# Altium PCB SHT3X.pcbdoc
Units mm, origin at the board's own origin, x right, y up, seen from the top; angles counter-clockwise.
Board outline 74.68 x 74.42 mm, 2 copper layers (Top Layer, Bottom Layer); 12 components, 13 nets, 66 pads, 9 vias.
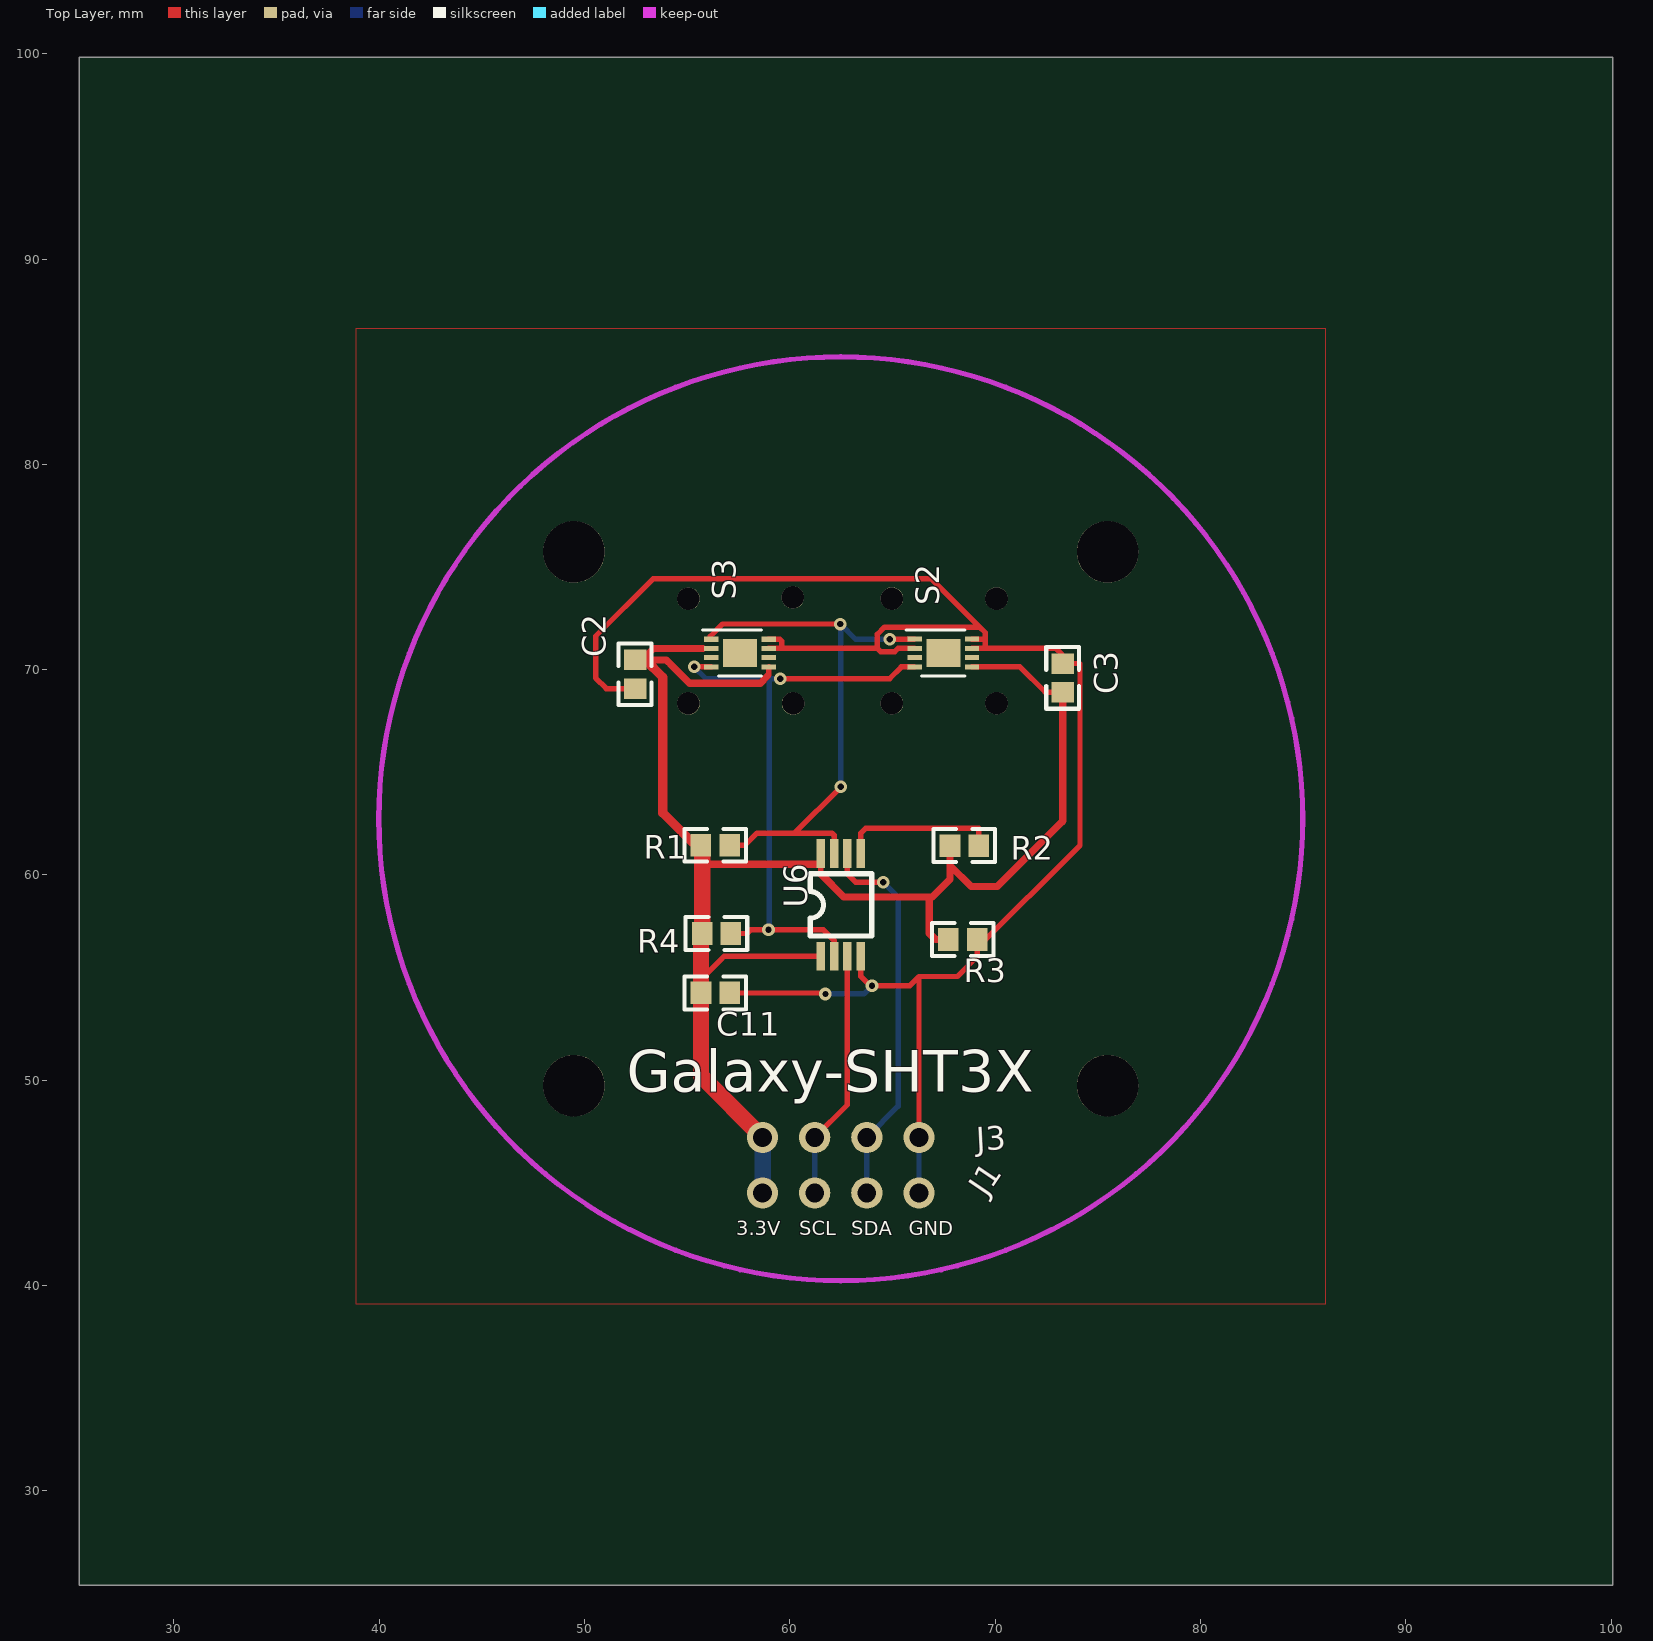
[diagram p0: Top Layer view]
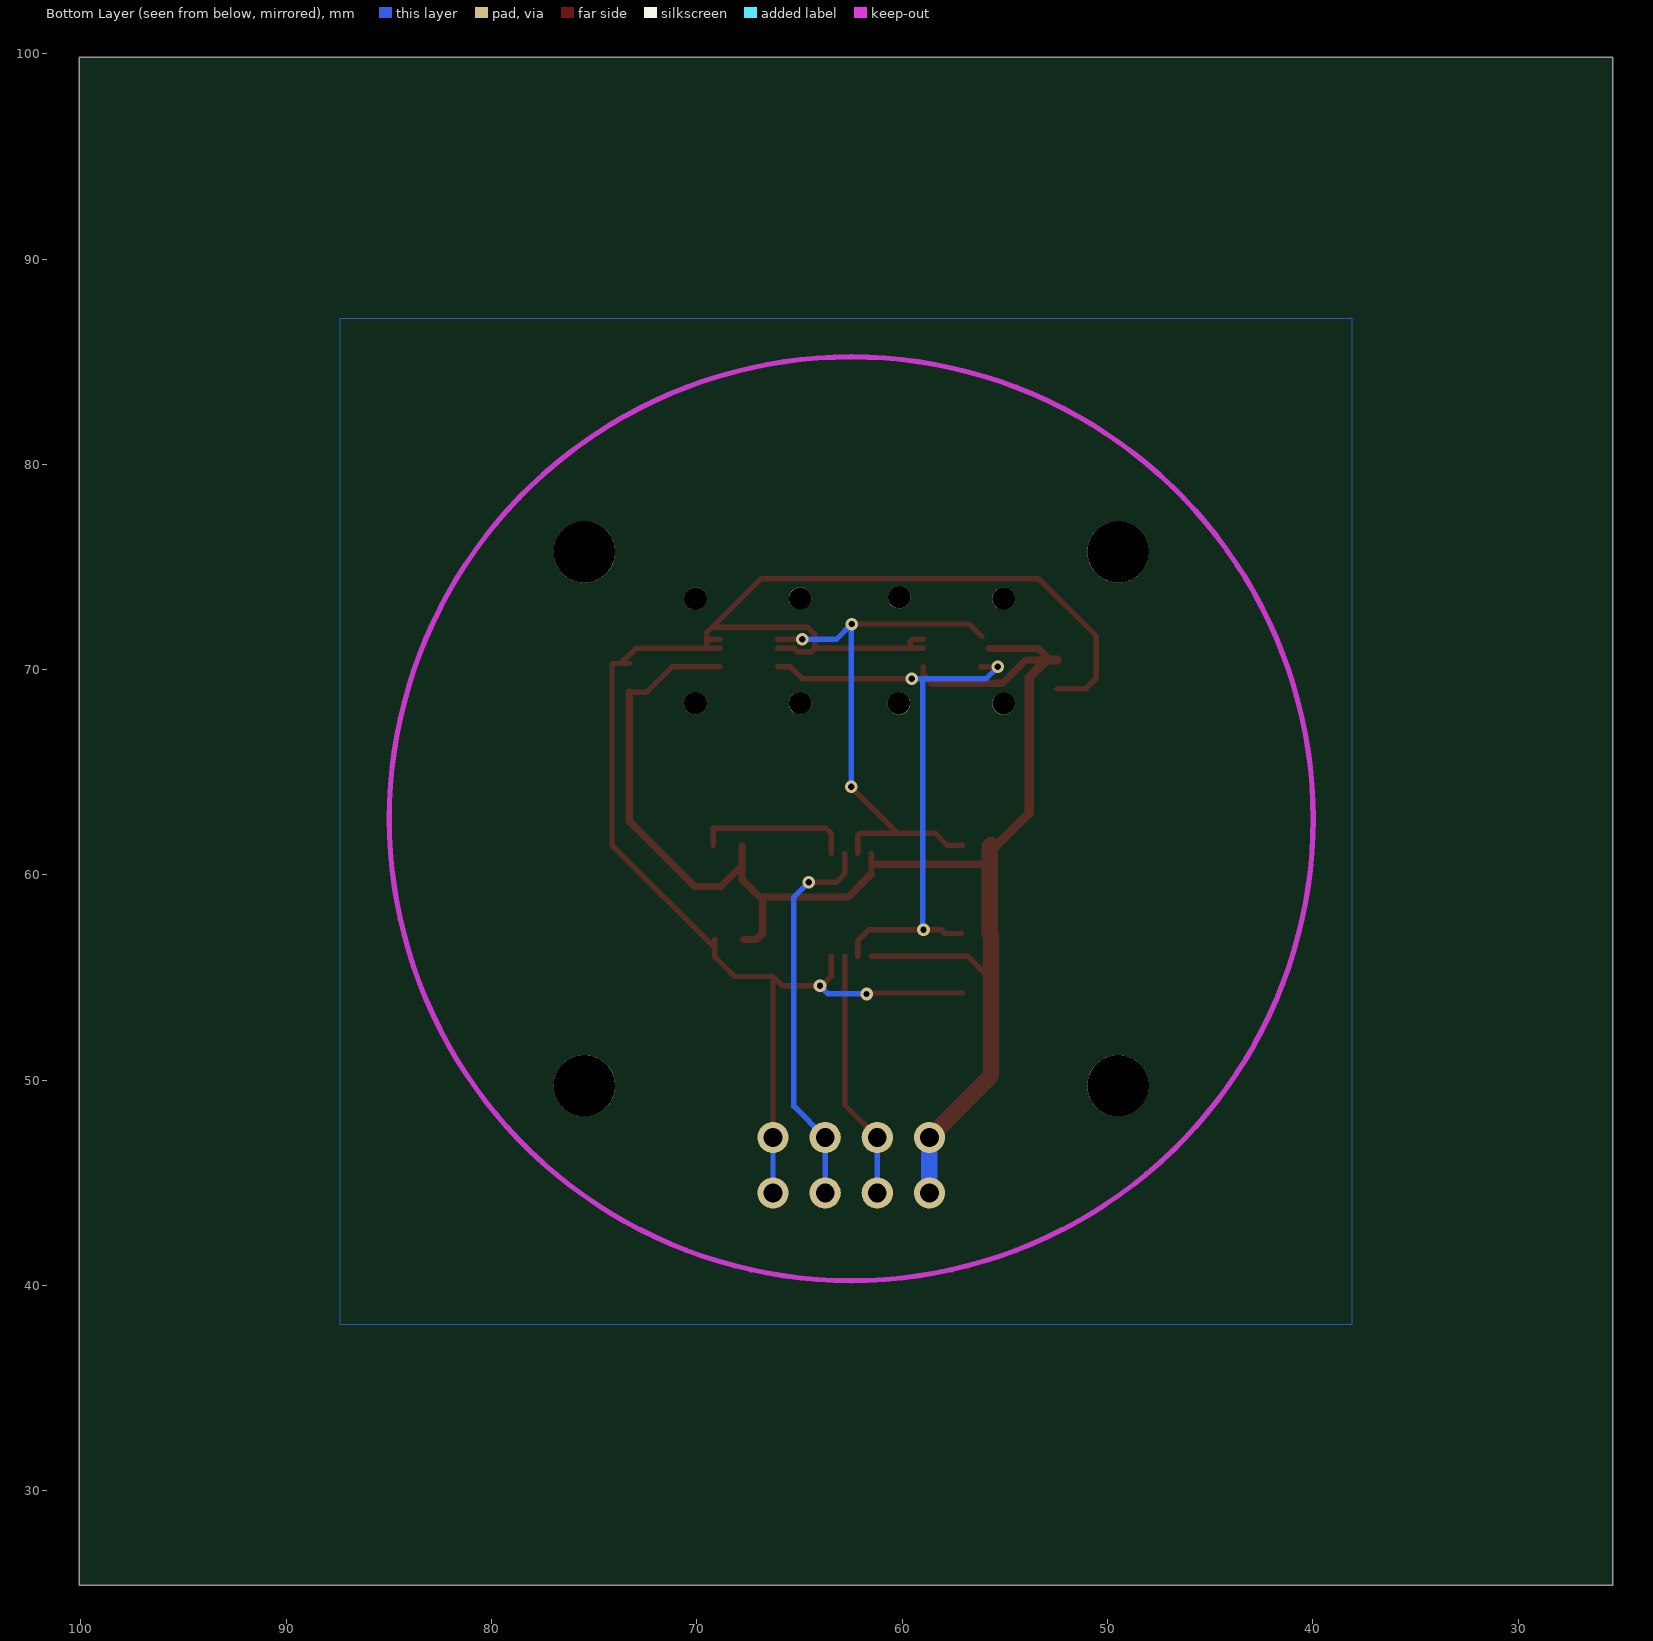
[diagram p1: Bottom Layer view, seen from below]

## Layer stack, top to bottom
Top Layer: signal copper (thickness not stored)
Dielectric: dielectric 0.32, FR-4, Dk 4.8
Bottom Layer: signal copper (thickness not stored)

## Board outline
100.076,25.4 25.4,25.4 25.4,99.822 100.076,99.822

## Components (designator, comment, footprint, x,y, rotation, side; value= is the part's Value field where it differs from the comment)
C2 "CAP-0603" 0603#1 52.464,70.576 r270 top
C3 "CAP-0603" 0603#2 73.292,68.798 r90 top
C11 "CAP-0603" 0603#3 57.176,54.254 r180 top
J1 "排针" PIN_4*2.54#1 58.674,44.704 r90 top
J3 "排针" PIN_4*2.54#2 58.674,47.218 r90 top
R1 "10K" 0603#3 55.574,61.448 r0 top
R2 "10K" 0603#3 67.704,61.432 r0 top
R3 "100K" 0603#3 69.228,56.86 r180 top
R4 "10K" 0603#3 55.626,57.15 r0 top
S2 "SHT31-DIS-B" DFN-8#1 67.45,70.83 r270 top
S3 "SHT31-DIS-B" DFN-8#2 57.544,70.83 r270 top
U6 "LTC4307CMS8#PBF" MSOP-8 62.48,58.544 r90 top

## Footprints (in the part's own frame and the unit in brackets; to place one, negate y for a bottom-side part, rotate by r counter-clockwise, add the part's x,y. Pads: shape width x height; smd on the part's side, far side on the other; paste and mask are expansions set on the pad)
0603#1 [mm]
  rect 1.001x1.1 smd: 1(0.099,-0.001) 2(1.498,-0.001)
  silkscreen extent -0.7,-0.8 2.3,0.8
0603#2 [mm]
  rect 0.998x1.102 smd: 1(0.103,0.001) 2(1.502,0.001)
  silkscreen extent -0.7,-0.8 2.3,0.8
0603#3 [mm]
  rect 1x1.1 smd: 1(0.1,0) 2(1.5,0)
  silkscreen extent -0.7,-0.8 2.3,0.8
DFN-8#1 [mm]
  rect 0.249x0.701 smd: 1(-0.658,-1.372) 4(0.694,-1.372) 5(0.694,1.427) 8(-0.658,1.427)
  rect 0.251x0.701 smd: 2(-0.207,-1.372) 3(0.243,-1.372) 6(0.243,1.427) 7(-0.207,1.427)
  rect 0.681x0.831 smd: 9(-0.322,0.443) 9(-0.322,-0.388) 9(0.358,0.443) 9(0.358,-0.388)
  silkscreen extent -1.11,-1.8 1.14,1.08
DFN-8#2 [mm]
  rect 0.251x0.701 smd: 1(-0.656,-1.372) 2(-0.207,-1.372)
  rect 0.249x0.701 smd: 3(0.244,-1.372) 4(0.694,-1.372)
  rect 0.249x0.699 smd: 5(0.694,1.428) 6(0.244,1.428)
  rect 0.251x0.699 smd: 7(-0.207,1.428) 8(-0.656,1.428)
  rect 0.681x0.831 smd: 9(-0.322,0.443) 9(-0.322,-0.388) 9(0.358,0.443) 9(0.358,-0.388)
  silkscreen extent -1.11,-1.8 1.14,1.08
MSOP-8 [mil]
  rect 55x16 smd: 1(-98.5,38.5) 2(-98.5,12.5) 3(-98.5,-12.5) 4(-98.5,-38.5) 5(98.5,-38.5) 6(98.5,-12.5) 7(98.5,12.5) 8(98.5,38.5)
  silkscreen extent -60,-60 60,59
PIN_4*2.54#1 [mil]
  round 60 hole 36: 1(-7.4,0) 2(-7.4,-100) 3(-7.4,-200) 4(-7.4,-300)
PIN_4*2.54#2 [mil]
  round 60 hole 36: 1(0,0) 2(0,-100) 3(0,-200) 4(0,-300)

## Free pads (board coordinates)
  round 3 hole 3 unplated: ""(49.484,49.738) ""(49.484,75.738) ""(75.484,49.738) ""(75.484,75.738)
  round 1.1 hole 1.1 unplated: ""(55.063,68.356) ""(55.063,73.456) ""(60.146,73.525) ""(60.163,68.356) ""(64.97,68.364) ""(64.97,73.464) ""(70.07,68.364) ""(70.07,73.464)

## Via types
v1: diameter 0.61, hole 0.31, Top Layer to Bottom Layer, 7 vias
v2: diameter 0.62, hole 0.305, Top Layer to Bottom Layer, 2 vias

## Nets (pads, with @x,y where several pads share a name; then routed paths per layer and width w, separated by ;. In a path a pad name is that pad's centre, name@x,y a point inside that pad or via, vN(x,y) a via of type N, cw(c..) or ccw(c..) an arc to the next point about the centre after c; other vN are vias at no path point)
3.3V: C2.1 C3.1 C11.2 J1.1 J3.1 R1.1 R2.1 R3.2 R4.1 S2.5 S3.2 S3.5 U6.1 U6.8 | length 89.9
  Top Layer w0.26: 55.613,60.59 55.656,60.59 55.727,60.521 ; R1.1@55.613,61.011 55.613,61.387 R1.1 ; C11.2 55.676,54.914 56.642,55.88 56.805,56.043 U6.1 ; 55.727,56.307 55.727,57.15 R4.1@55.727,57.572 ; 58.918,69.692 58.974,69.748 S3.5@58.974,70.137 ; 61.503,60.056 61.503,60.521 U6.8@61.503,61.047 ; S2.5 71.211,70.137 72.448,68.9 72.87,68.9 C3.1
  Top Layer w0.35: 54.202,70.258 55.118,69.342 58.568,69.342 58.918,69.692 ; 54.259,70.201 53.984,70.476 C2.1 52.802,70.476 53.364,71.038 54.734,71.038 ; 54.536,71.037 55.768,71.037 ; R4.1@55.727,57.572 55.727,57.991 ; 55.727,60.521 U6.8@61.503,60.521 ; 61.503,60.056 62.623,58.928 65.534,58.928 66.936,58.928 67.804,59.796 R2.1 67.804,60.466 68.834,59.436 70.104,59.436 73.152,62.484 73.291,62.623 C3.1 ; 66.791,58.928 66.791,57.161 67.056,56.896 67.092,56.86 R3.2@67.728,56.86
  Top Layer w0.45: C2.1@52.463,70.475 52.969,70.475 53.815,69.629 53.815,63.025 55.392,61.448 R1.1 ; 55.727,57.991 55.727,60.521
  Top Layer w0.8: R1.1 55.726,61.396 R4.1 55.676,57.1 C11.2 55.676,50.216 J3.1
  Bottom Layer w0.8: J1.1 J3.1
GND: C2.2 C3.2 C11.1 J1.4 J3.4 R3.1 S2.2 S2.7 S2.8 S3.7 S3.8 U6.4 | length 88.7
  Top Layer w0.26: C2.2 51.065,69.077 50.546,69.596 50.546,71.628 53.34,74.422 66.901,74.422 69.248,72.075 ; C11.1 58.607,54.255 61.687,54.255 v2(61.734,54.208) ; S3.7@58.973,71.037 59.614,71.037 ; S3.8@58.973,71.486 59.509,71.486 59.614,71.379 59.614,71.037 ; U6.4@63.459,56.043 63.459,55.052 63.902,54.61 v2(64.008,54.61) 65.851,54.61 66.294,55.052 ; S2.2 65.27,71.037 65.113,70.882 64.424,70.882 64.267,71.037 ; J3.4 66.294,55.052 ; S2.7 69.52,71.037 ; S2.8 69.52,71.489 ; R3.1 R3.1@69.128,56.439 ; C3.2 C3.2@73.713,70.3 ; 59.614,71.037 64.267,71.037 ; 64.267,71.037 64.267,71.725 64.617,72.075 69.248,72.075 ; 66.294,55.052 68.163,55.052 69.128,56.018 R3.1@69.128,56.439 ; R3.1@69.128,56.439 74.135,61.446 74.135,70.3 C3.2@73.713,70.3 ; 69.248,72.075 69.52,71.804 69.52,71.489 ; 69.52,71.037 69.52,71.489 ; 69.52,71.037 72.976,71.037 C3.2@73.713,70.3
  Bottom Layer w0.26: v2(61.734,54.208) 63.606,54.208 v2(64.008,54.61) ; J1.4 J3.4
S2_3: S2.3
S2_6: S2.6
S3_3: S3.3
S3_6: S3.6
S$67: 
S$69: 
SCL0: J1.2 J3.2 U6.3 | length 12.2
  Top Layer w0.26: J3.2 62.799,48.801 U6.3@62.799,56.043
  Bottom Layer w0.26: J1.2 J3.2
SCL1: R4.2 S2.4 S3.4 U6.2 | length 30.7
  Top Layer w0.26: v1(55.339,70.137) S3.4 ; R4.2 57.919,57.15 58.098,57.329 v1(58.963,57.329) 61.643,57.329 62.114,56.858 62.163,56.809 U6.2 ; v1(59.537,69.561) 64.861,69.561 65.435,70.137 S2.4
  Bottom Layer w0.26: v1(55.339,70.137) 55.913,69.561 v1@59.309,69.561 ; v1(58.963,57.329) 59.004,57.37 59.004,69.561 v1@59.309,69.561 ; v1(59.537,69.561) v1@59.309,69.561
SDA0: J1.3 J3.3 U6.6 | length 19
  Top Layer w0.26: U6.6@62.799,61.047 62.799,60.056 63.216,59.639 v1(64.556,59.639)
  Bottom Layer w0.26: J1.3 J3.3 65.278,48.742 65.278,58.928 64.567,59.639 v1(64.556,59.639)
SDA1: R1.2 S2.1 S3.1 U6.7 | length 27.9
  Top Layer w0.26: 56.134,71.628 56.731,72.225 v1(62.466,72.225) ; R1.2 57.79,61.448 57.805,61.433 58.41,62.037 60.233,62.037 ; U6.7@62.164,61.047 62.164,61.931 62.057,62.037 60.233,62.037 ; v1(62.486,64.29) 60.233,62.037 ; v1(64.866,71.479) 65.425,71.479 65.435,71.489 S2.1
  Bottom Layer w0.26: v1(62.486,64.29) 62.486,72.205 v1(62.466,72.225) 63.212,71.479 v1(64.866,71.479)
U6_5: R2.2 U6.5 | length 7.7
  Top Layer w0.26: U6.5@63.459,61.047 63.459,62.037 63.695,62.274 69.205,62.274 R2.2
pads on no net: S2.9 S3.9

## Polygon pours and split planes (outlines as drawn)
GND on Bottom Layer (solid): 38.1,87.122 38.1,38.1 87.376,38.1 87.376,87.122 38.1,87.122
GND on Top Layer (solid): 38.862,86.614 38.862,39.116 86.106,39.116 86.106,86.614 38.862,86.614

## Keep-outs
Keep-Out Layer:
  lines w0.254: 39.984,62.738 cw(c62.484,62.738) 84.984,62.738 cw(c62.484,62.738) 39.984,62.738

## Silkscreen, mask and mechanical layers (free items; w line width, h text height)
Top Overlay:
  text "Galaxy-SHT3X" at 52.071,49.438 h2.03
  text "3.3V" at 57.404,42.449 h0.7
  text "SCL" at 60.452,42.449 h0.7
  text "SDA" at 62.992,42.449 h0.7
  text "GND" at 65.786,42.449 h0.7